# EAGLE board relay_control (EAGLE 9.7.0)

Size 118.68 x 131.05 mm. Coordinates in mm from the lower left corner, seen from the top.
Outline: 0,0 118.68,0 118.68,131.05 0,131.05 0,0
Copper layers (1*16): Top 0.035mm / dielectric 1.5mm / Bottom 0.035mm
Design rules "default": minimum track width 6mil, minimum drill 0.35mm, track to track 6mil, track to pad 6mil, pad to pad 6mil, via to via 6mil, smd to smd 6mil, copper to edge 40mil, drill to drill 6mil, minimum pad ring 10mil, minimum via ring 8mil, stop-mask expansion 4mil, vias tented up to drill 0mil, thermal gap 10mil

## Footprints (pad centres in the part's own frame; a part is rotated, then mirrored left to right if it is on the bottom)
LEDRD254W60D565H860B = drill 0.981 pad 1.581: 1 -1.27,0; 2 1.27,0
LU-5-R = drill 0.8: 1 -6.35,-3.81; 5 3.81,-3.81; 6 6.35,-3.81; 7 6.35,3.81; 8 3.81,3.81; 12 -6.35,3.81
RESAD1016W63L850D250B = drill 0.83 pad 1.43: 1 -5.08,0; 2 5.08,0
SWITCH-MOMENTARY-PTH-6.5MM = drill 1.016 pad 1.88: 1 -3.251,2.261; 2 3.251,2.261; 3 -3.251,-2.261; 4 3.251,-2.261
ARDUINO-UNO-R3-SHIELD = drill 1.016 pad 1.88: 3.3V 24.13,-2.54; 5V 24.13,0; A0 24.13,12.7; A1 24.13,15.24; A2 24.13,17.78; A3 24.13,20.32; A4 24.13,22.86; A5 24.13,25.4; AREF -24.13,-13.97; D2 -24.13,20.32; D3 -24.13,17.78; D4 -24.13,15.24; D5 -24.13,12.7; D6 -24.13,10.16; D7 -24.13,7.62; D8 -24.13,3.81; D9 -24.13,1.27; D10 -24.13,-1.27; D11 -24.13,-3.81; D12 -24.13,-6.35; D13 -24.13,-8.89; GND@0 24.13,2.54; GND@1 24.13,5.08; GND@2 -24.13,-11.43; IOREF 24.13,-7.62; NC 24.13,-10.16; RES 24.13,-5.08; RX -24.13,25.4; SCL -24.13,-19.05; SDA -24.13,-16.51; TX -24.13,22.86; VIN 24.13,7.62

## Placement (x,y rotation side)
D1  RED  [LEDRD254W60D565H860B]  10.69,71.65 240 top
D2  RED  [LEDRD254W60D565H860B]  37.31,86.53 240 top
D3  RED  [LEDRD254W60D565H860B]  61.45,101.39 240 top
K1  RELAY-SPDT_LU-5-R  [LU-5-R]  15.04,91.29 180 top
K2  RELAY-SPDT_LU-5-R  [LU-5-R]  42.06,106.89 180 top
K3  RELAY-SPDT_LU-5-R  [LU-5-R]  65.86,120.89 180 top
R1  10k  [RESAD1016W63L850D250B]  83.96,17.17 90 top
R2  220  [RESAD1016W63L850D250B]  18.1,63.83 150 top
R3  10k  [RESAD1016W63L850D250B]  97.77,16.98 90 top
R4  10k  [RESAD1016W63L850D250B]  108.18,17.11 90 top
S1  SWITCH_MOMENTARY  [SWITCH-MOMENTARY-PTH-6.5MM]  89.77,46.12 90 top
S2  SWITCH_MOMENTARY  [SWITCH-MOMENTARY-PTH-6.5MM]  100.22,46.06 90 top
S3  SWITCH_MOMENTARY  [SWITCH-MOMENTARY-PTH-6.5MM]  110.42,46.19 90 top
U1  ARDUINO-UNO-R3-SHIELD  [ARDUINO-UNO-R3-SHIELD]  47.88,29.84 270 top

## Library data of the parts
D1-D3 = Tinkercad; CATEGORY: Opto-Electronic; SUB-CATEGORY: LED; VALUE: LED_RED
K1-K3 R1-R4 S1-S3 U1 = Tinkercad

## Nets
D1_A: D1.1 K1.8
D2_A: D2.1 K2.8
D2_C: D1.2 D2.2 D3.2 R2.2
D3_A: D3.1 K3.8
U1_3.3V: S1.3 S2.3 S3.3 U1.3.3V
U1_5V: K1.7 K2.7 K3.7 U1.5V
U1_D2: R1.2 S1.1 S1.2 U1.D2
U1_D3: R3.2 S2.1 S2.2 U1.D3
U1_D4: R4.2 S3.1 S3.2 U1.D4
U1_D11: K3.5 U1.D11
U1_D12: K2.5 U1.D12
U1_D13: K1.5 U1.D13
U1_GND: R1.1 R2.1 R3.1 R4.1 U1.GND@0 U1.GND@1 U1.GND@2

## Tracks (layer width: path | path; a pad name or v marks a point on that pad's centre or on a via)
D1_A  (1 unrouted)
D2_A  (1 unrouted)
D2_C  (3 unrouted)
D3_A  (1 unrouted)
U1_3.3V  (3 unrouted)
U1_5V  (3 unrouted)
U1_D2  (3 unrouted)
U1_D3  (3 unrouted)
U1_D4  (3 unrouted)
U1_D11  (1 unrouted)
U1_D12  (1 unrouted)
U1_D13  (1 unrouted)
U1_GND  (6 unrouted)